# Altium PCB altium_tutorial.PcbDoc
Units mil, origin at the board's own origin, x right, y up, seen from the top; angles counter-clockwise.
Board outline 5695 x 3405 mil, 2 copper layers (Top Layer, Bottom Layer); 56 components, 43 nets, 233 pads, 119 vias.
Unrouted connection lines stored in the file: 167.
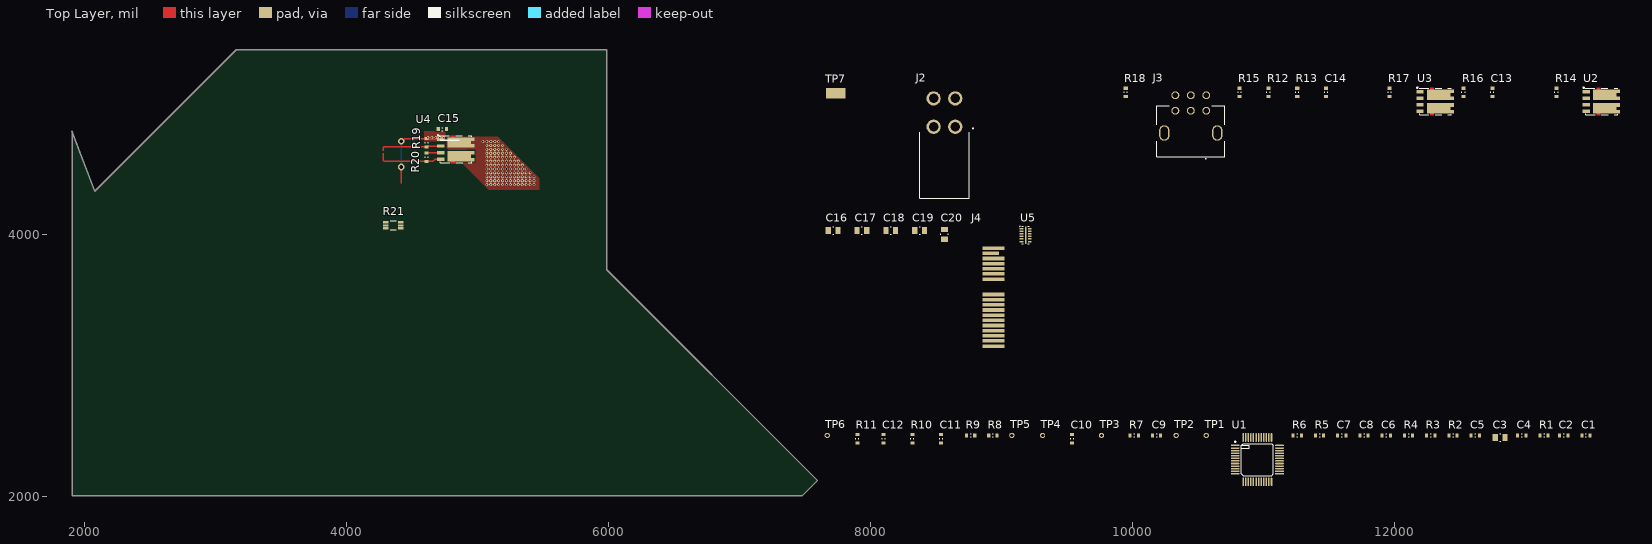
[diagram p0: Top Layer view]
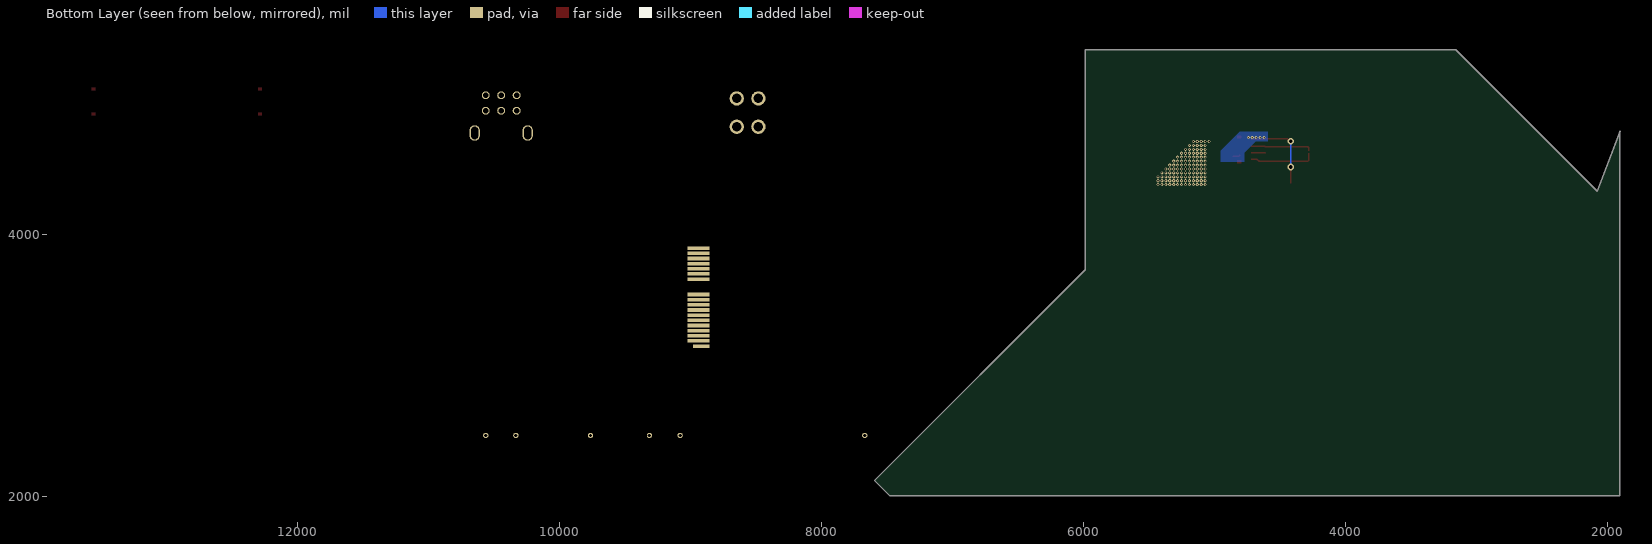
[diagram p1: Bottom Layer view, seen from below]

## Layer stack, top to bottom
Top Solder: solder mask 0.4, Solder Resist, Dk 3.5
Top Layer: signal copper 1.4
Dielectric 1: dielectric 12.6, FR-4, Dk 4.8
Bottom Layer: signal copper 1.4
Bottom Solder: solder mask 0.4, Solder Resist, Dk 3.5

## Board outline
1900,4790 1905,4785 1905,2005 7480,2005 7595,2120 5985,3730 5985,5410 3155,5410 2075,4330

## Design rules (kind name [scope] priority, off if disabled: settings)
Clearance [All] p1: gap=10 ignorepadtopadclearanceinfootprint=FALSE except(0: Arc-Hole Track-Hole SMDPad-Hole THPad-Hole Via-Hole Fill-Hole Poly-Hole Region-Hole Text-Hole)
PolygonConnect PolygonConnect_1 [All vs IsNamedPolygon('NONET_L01_P-001')] p1: connectstyle=Direct reliefconductorwidth=10 reliefentries=4 polygonreliefangle="90 Angle" airgapwidth=10
PolygonConnect [All] p2: connectstyle=Relief reliefconductorwidth=10 reliefentries=4 polygonreliefangle="90 Angle" airgapwidth=10
RoomDefinition motordriver-v3.1_IO [InComponentClass('motordriver-v3.1_IO')] p1: confinementstyle=ConfineIn formatcopy=TRUE lockcomponents=FALSE outline 7640,2645 9265,2645 9265,4175 7640,4175
RoomDefinition motordriver-v3.1_A3931 [InComponentClass('motordriver-v3.1_A3931')] p2: confinementstyle=ConfineIn formatcopy=TRUE lockcomponents=FALSE outline 7640,2065 13525,2065 13525,2595 7640,2595
RoutingVias [All] p1: holewidth=28 width=50 viastyle="Through Hole" minholewidth=28 minwidth=50 maxholewidth=28 maxwidth=50
SolderMaskExpansion [All] p1: expansion=4 istentingtop=FALSE
Width [All] p1: maxlimit=10 minlimit=10 preferedwidth=10
30 further rules are at their usual default settings.

## Classes and differential pairs
net class motordriver-v3.1_power-stage_Nets: 5V AGND CSN_R CSP_R GHA GHB GHC GLA GLB GLC GND_R H1 H2 H3 NetJ2_4 NetJ3_6 NetU2_S1D2 NetU3_S1D2 NetU4_S1D2 SA SB SC VCC
net class motordriver-v3.1_IO_Nets: AGND CSOUT CSOUT_OB DIR DIR_OB FF1 FF1_OB FF2 FF2_OB NetU5_2 NetU5_11 PWM PWM_OB VCC
net class motordriver-v3.1_A3931_Nets: 5V AGND CA CB CC CSN CSN_R CSOUT CSP CSP_R DIR DIRO FF1 FF2 GHA GHB GHC GLA GLB GLC GND_R H1 H2 H3 NetC2_1 NetC2_2 NetC4_1 NetC12_2 NetR9_1 PWM RESET SA SB SC TACHO VCC VDSTH VREF
component class motordriver-v3.1_power-stage: C13 C14 C15 J2 J3 R12 R13 R14 R15 R16 R17 R18 R19 R20 R21 TP7
component class motordriver-v3.1_IO: C16 C17 C18 C19 C20 J4 U5
component class motordriver-v3.1_A3931: C1 C2 C3 C4 C5 C6 C7 C8 C9 C10 C11 C12 R1 R2 R3 R4 R5 R6 R7 R8 R9 R10 R11 TP1 TP2 TP3 TP4 TP5 TP6 U1

## Components (designator, comment, footprint, x,y, rotation, side; value= is the part's Value field where it differs from the comment)
C1 "100nF 50V" 0603 13465,2465 r0 top value=100nF
C2 "470nF 50V" 0603 13295,2465 r0 top value=470nF
C3 "10uF 50V" 0805 12810,2450 r0 top value=10uF
C4 "4.7uF" 0603 12975,2465 r0 top
C5 "82nF 50V" 0603 12620,2465 r0 top value=82nF
C6 "82nF 50V" 0603 11940,2465 r0 top value=82nF
C7 "1000pF" 0603 11600,2465 r0 top
C8 "1000pF" 0603 11770,2465 r0 top
C9 "82nF 50V" 0603 10185,2465 r0 top value=82nF
C10 "1000pF" 0603 9540,2440 r90 top
C11 "100nF 50V" 0603 8540,2440 r90 top value=100nF
C12 "1000pF" 0603 8100,2440 r90 top
C13 "100nF 50V" 0603 12750,5085 r90 top value=100nF
C14 "100nF 50V" 0603 11480,5085 r90 top value=100nF
C15 "100nF 50V" 0603 4730,4805 r0 top value=100nF
C16 "10uF 50V" 0805 7715,4030 r0 top value=10uF
C17 "10uF 50V" 0805 7935,4030 r0 top value=10uF
C18 "10uF 50V" 0805 8155,4030 r0 top value=10uF
C19 "10uF 50V" 0805 8375,4030 r0 top value=10uF
C20 "10uF 50V" 0805 8565,4000 r90 top value=10uF
J2 "CN HDR 4POS Molex 26013115 (R)" 26013115 8565,4535 r0 top
J3 "CN HDR 6POS Molex 43045-0622 (R)" 430450622 10565,4945 r0 top
J4 "CN PCIE 36 Card Edge" "CN PCIE EDGE 36CKT" 8940,3600 r90 top
R1 "200k" 0603 13145,2465 r0 top
R2 "10k" 0603 12450,2465 r0 top
R3 "100k" 0603 12280,2465 r0 top
R4 "10k" 0603 12110,2465 r0 top
R5 "JUMPER" 0603 11430,2465 r0 top value=0
R6 "4.7k" 0603 11260,2465 r0 top
R7 "1k" 0603 10015,2465 r0 top
R8 "1k" 0603 8935,2465 r0 top
R9 "JUMPER" 0603 8765,2465 r0 top value=0
R10 "5.1k" 0603 8320,2440 r90 top
R11 "47k" 0603 7900,2440 r90 top
R12 "10k" 0603 11040,5085 r90 top
R13 "10k" 0603 11260,5085 r90 top
R14 "495k" 0603 13240,5085 r90 top
R15 "10k" 0603 10820,5085 r90 top
R16 "495k" 0603 12530,5085 r90 top
R17 "495k" 0603 11965,5085 r90 top
R18 "495k" 0603 9950,5085 r90 top
R19 "495k" 0603 4610,4700.06 r270 top
R20 "495k" 0603 4610,4590 r270 top
R21 "RES 20m 1W" "1206 - Sense" 4355,4070 r0 top
TP1 "Test Point (Via)" TP 10565,2465 r90 top
TP2 "Test Point (Via)" TP 10335,2465 r90 top
TP3 "Test Point (Via)" TP 9765,2465 r90 top
TP4 "Test Point (Via)" TP 9315,2465 r90 top
TP5 "Test Point (Via)" TP 9080,2465 r90 top
TP6 "Test Point (Via)" TP 7670,2465 r90 top
TP7 "Test Point - 5019" TP380X203 7735,5080 r0 top
U1 "A3931" "48-LQFP-EP (7x7)" 10955,2280 r0 top
U2 "NOTE: Nearing End of Life" PG-TDSON-8-10 13585,5015 r0 top
U3 "NOTE: Nearing End of Life" PG-TDSON-8-10 12315,5015 r0 top
U4 "NOTE: Nearing End of Life" PG-TDSON-8-10 4835,4650 r0 top
U5 "TPD6F002DSVR" PSON50P140X80_HS-13N 9185,3995 r0 top

## Footprints (in the part's own frame and the unit in brackets; to place one, negate y for a bottom-side part, rotate by r counter-clockwise, add the part's x,y. Pads: shape width x height; smd on the part's side, far side on the other; paste and mask are expansions set on the pad)
"48-LQFP-EP (7x7)" [mm]
  oval 1.7x0.3 smd: 1(-4.3,2.75) 2(-4.3,2.25) 3(-4.3,1.75) 4(-4.3,1.25) 5(-4.3,0.75) 6(-4.3,0.25) 7(-4.3,-0.25) 8(-4.3,-0.75) 9(-4.3,-1.25) 10(-4.3,-1.75) 11(-4.3,-2.25) 12(-4.3,-2.75) 25(4.3,-2.75) 26(4.3,-2.25) 27(4.3,-1.75) 28(4.3,-1.25) 29(4.3,-0.75) 30(4.3,-0.25) 31(4.3,0.25) 32(4.3,0.75) 33(4.3,1.25) 34(4.3,1.75) 35(4.3,2.25) 36(4.3,2.75)
  oval 0.3x1.7 smd: 13(-2.75,-4.3) 14(-2.25,-4.3) 15(-1.75,-4.3) 16(-1.25,-4.3) 17(-0.75,-4.3) 18(-0.25,-4.3) 19(0.25,-4.3) 20(0.75,-4.3) 21(1.25,-4.3) 22(1.75,-4.3) 23(2.25,-4.3) 24(2.75,-4.3) 37(2.75,4.3) 38(2.25,4.3) 39(1.75,4.3) 40(1.25,4.3) 41(0.75,4.3) 42(0.25,4.3) 43(-0.25,4.3) 44(-0.75,4.3) 45(-1.25,4.3) 46(-1.75,4.3) 47(-2.25,4.3) 48(-2.75,4.3)
  silkscreen extent -4.42,-3.1 3.1,3.57, body extent -3.5,-3.5 3.5,3.5, height 1.6
0603 [mm] "Chip Resistor, 2-Leads, Body 1.60x0.80mm, IPC High Density"
  rect 0.6x0.8 smd: 1(-0.8,0) 2(0.8,0)
  silkscreen extent -0.1,-0.3 0.1,0.3, body extent -0.8,-0.4 0.8,0.4, height 0.6
0805 [mil]
  rect 40x55 smd: 1(-37,0) 2(37,0)
  silkscreen extent -4,-28 4,28, body extent -47,-28 47,28, height 24
"1206 - Sense" [mil] "4-Wire Sense Footprint"
  rect 41.34x20 smd: 1(-57,-24) 1(-57,24) 2(57,-24) 2(57,24)
  rect 41.34x15 smd paste+0: 3(-57,0) 4(57,0)
  silkscreen extent -24,-33 24,33
26013115 [mm]
  round 2.775 hole 1.85: 1(2.1,7.3) 2(-2.1,7.3) 3(2.1,12.8) 4(-2.1,12.8)
  round 1.525 hole 3.05 unplated: MH1(0,0)
  silkscreen extent -4.8,-6.6 5.6,7.05, body extent -4.8,-6.5 5.2,13.44, height 11.5
430450622 [mm]
  round 1.53 hole 1.02: 1(0,0) 2(-3,0) 3(-6,0) 4(0,3) 5(-3,3) 6(-6,3)
  oval 2x3 hole 1.4 slot 2.4 at 90 deg: MH1(2.15,-4.32) MH2(-8.15,-4.32)
  silkscreen extent -9.57,-9.37 3.57,0.99, body extent -9.62,-8.95 3.58,3.29, height 8.83
"CN PCIE EDGE 36CKT" [mm] "PCIE X1 36pin card edge"
  rect 0.7x3.2 smd far side paste-1: A1(-11.5,0.5)
  rect 0.7x4.2 smd far side paste-1: A2(-10.5,0) A3(-9.5,0) A4(-8.5,0) A5(-7.5,0) A6(-6.5,0) A7(-5.5,0) A8(-4.5,0) A9(-3.5,0) A10(-2.5,0) A11(-1.5,0) A12(1.5,0) A13(2.5,0) A14(3.5,0) A15(4.5,0) A16(5.5,0) A17(6.5,0) A18(7.5,0)
  rect 0.7x4.2 smd paste-1: B1(-11.5,0) B2(-10.5,0) B3(-9.5,0) B4(-8.5,0) B5(-7.5,0) B6(-6.5,0) B7(-5.5,0) B8(-4.5,0) B9(-3.5,0) B10(-2.5,0) B11(-1.5,0) B12(1.5,0) B13(2.5,0) B14(3.5,0) B15(4.5,0) B16(5.5,0) B18(7.5,0)
  rect 0.7x3.2 smd paste-1: B17(6.5,0.5)
PG-TDSON-8-10 [mm] "Infineon specific mosfet array footprint"
  rect 1.4x0.65 smd paste-0.1: 1(-2.99,1.905) 2(-2.99,0.635) 3(-2.99,-0.635) 4(-2.99,-1.905)
  rect 4.6x2 smd paste-3: 6(0.625,-1.325) 8(0.625,1.325)
  rect 1.4x0.7 smd paste-0.1: 6(2.89,-1.99) 6(2.89,-0.66) 8(2.89,0.66) 8(2.89,1.99)
  Top Layer region: -1.04,2.1 -0.25,2.1 -0.25,2.7 -1.04,2.7
  Top Layer region: -1.04,-2.7 -0.25,-2.7 -0.25,-2.1 -1.04,-2.1
  silkscreen extent -3.6,-2.6 3.08,2.8, body extent -3.07,-2.57 3.08,2.58, height 1.1
PSON50P140X80_HS-13N [mm] "PSON, 12-Leads, Body 3.00x1.35mm, Pitch 0.50mm, Thermal Pad 3.05x0.31mm, IPC Medium Density"
  rect 0.7x0.3 smd: 1(-0.8,1.25) 2(-0.8,0.75) 3(-0.8,0.25) 4(-0.8,-0.25) 5(-0.8,-0.75) 6(-0.8,-1.25) 7(0.8,-1.25) 8(0.8,-0.75) 9(0.8,-0.25) 10(0.8,0.25) 11(0.8,0.75) 12(0.8,1.25)
  rect 0.31x3.4 smd: 13(0,0)
  silkscreen extent -1.17,-1.7 0.72,1.75, body extent -0.72,-1.55 0.72,1.55, height 0.8
TP [mil] "Test point (40mil Standard)"
  round 40 hole 25: 1(0,0)
TP380X203 [mm]
  rect 3.8x2.03 smd: 1(0,0)

## Part data
C1 C11 C13 C14 C15: library part "CAP 100nF 50V", "CAP CER 0.1UF 50V X7R 0805", Package=0805, Rating=50V, Tolerance=10%
C2: library part "CAP 470nF 50V", "CAP CER 0.1UF 50V X7R 0805", Package=0805, Rating=50V, Tolerance=10%
C3 C16 C17 C18 C19 C20: library part "CAP 10uF 50V", "CAP CER 10UF 50V X7R", Package=1210, Rating=50V, Tolerance=10%, ComponentLink1Description=digikey, ComponentLink1URL=https://www.digikey.ca/en/products/detail/kemet/C1210C106M5RACTU/4918883
C4: library part "CAP 4.7uF 35V", "CAP CER 4.7UF 35V X7R 0603/0805", Operating Temperature="-55°C ~ 125°C", Package=0603/0805, Rating=35V, Temperature Coefficient=X7R, Tolerance=10%
C5 C6 C9: library part "CAP 82nF 50V", "CAP CER 0.082UF 50V X7R 0805", Alt. Value=82nF, Package=0805, Rating=50V, Tolerance=5%
C7 C8 C10 C12: library part "CAP 1000pF 50V", "CAP CER 1000PF 50V X7R 0603/0805", Operating Temperature="-55°C ~ 125°C", Package=0603/0805, Rating=50V, Temperature Coefficient=X7R, Tolerance=10%
J2: "Molex 26013115 4POS Minifit / dual row, right angle"
J3: "Molex 43045-0622 6POS Microfit / dual row, right angle"
J4: "36 Position Male PCIE Connector"
R1: library part "RES 200k 1/8W", "RES SMD 200K OHM 5% 1/8W 0805", Package=0805, Power (Watts)=0.125W, Tolerance=5%
R2 R4 R12 R13 R15: library part "RES 10k 1/8W - 1%", "RES SMD 10K OHM 1% 1/8W 0805", Package=0805, Power (Watts)=0.125W, Tolerance=1%
R3: library part "RES 100k 1/8W - 1%", "RES SMD 100K OHM 1% 1/8W 0805", Package=0805, Power (Watts)=0.125W, Tolerance=1%
R5 R9: library part "RES 0 JUMPER", "RES SMD 0 OHM JUMPER GENERIC 0805", Package=0805
R6: library part "RES 4.7k 1/8W - 1%", "RES SMD 4.7k OHM 1% 1/8W 0805", Package=0805, Power (Watts)=0.125W, Tolerance=1%
R7 R8: library part "RES 1k 1/8W", "RES SMD 1K OHM 5% 1/8W 0805", Package=0805, Power (Watts)=0.125W, Tolerance=5%
R10: library part "RES 5.1k 1/8W - 1%", "RES SMD 5.1K OHM 1% 1/8W 0805", Package=0805, Power (Watts)=0.125W, Tolerance=1%
R11: library part "RES 47k 1/8W - 1%", "RES SMD 47K OHM 1% 1/8W 0805", Package=0805, Power (Watts)=0.125W, Tolerance=1%
R14 R16 R17 R18 R19 R20: library part "RES 495k 1/8W", "RES SMD 499K OHM 1% 1/8W 0805", Case Code (Imperial)=0805, Case Code (Metric)=2012, Manufacturer=Yageo, Manufacturer Part Number=RC0805FR-07499KL, Max Operating Temperature=155°C, Min Operating Temperature=-55°C, Power Rating=125mW, Resistance=499kR, Supplier Part Number 1=311-499KCRCT-ND, Temperature Coefficient=100ppm/°C, Tolerance=1%, Voltage Rating=150V, Case/Package=0805, Category="Chip SMD Resistors", ComponentLink1Description=https://datasheet.ciiva.com/15189/getdatasheetpartid-326570-15189975.pdf?src-supplier=Verical, ComponentLink1URL=https://datasheet.ciiva.com/15189/getdatasheetpartid-326570-15189975.pdf?src-supplier=Verical, Composition="Thick Film", Contact Plating=Tin,Lead,Matte, Depth=1.25mm, Lead Free="Lead Free", Length=2mm, Military Standard=Not, Packaging="Tape and Reel", Pricing 1="1=0.10000, 10=0.04000, 100=0.01630, 1000=0.00731, 2500=0.00635 (USD)", Radiation Hardening=No, RoHS=Yes, Stock 1=2275, Supplier 1=Digi-Key, Termination=SMD/SMT, Voltage Rating (DC)=150V
R21: "RES SMD 0.02 OHM 1% 1W 1206"
TP7: "PC Test Point, Miniature Phosphor Bronze, Silver Plating Surface Mount Mounting Type", Package="2010 Keystone", Digi-Key_Part_Number=36-5019CT-ND, Digi-Key_Purchase_URL=https://www.digikey.com/product-detail/en/keystone-electronics/5019/36-5019CT-ND/3907344?utm_source=snapeda&utm_medium=aggregator&utm_campaign=symbol, MF="Keystone Electronics", MP=5019
U1: library part A3931_A1, "IC MOTOR DRIVER 5.5V-50V 48LQFP - Alternative Symbol", Supplier Part Number 1=620-1290-1-ND, Digikey=620-1290-1-ND, Digikey Link=https://www.digikey.ca/product-detail/en/allegro-microsystems/A3931KJPTR-T/620-1290-1-ND/2000021, Supplier 1=Digi-Key
U2 U3 U4: library part "MOSFET IPG20N06S4-15A", "MOSFET N+N 60V 20A", Supplier Part Number 1=726-IPG20N06S415ATMA, MF="Infineon Technologies", MF P/N=IPG20N06S4-15A, Supplier 1=Mouser
U5: library part "EMI FILTER TPD6F002DSVR", "6-Channel EMI Filter for Display Interface", Manufacturer="Texas Instruments", PACKAGE_DESIGNATOR=DSV, Copyright="Copyright (C) 2018 Accelerated Designs. All rights reserved", Datasheet_URL=http://www.ti.com/lit/gpn/TPD6F002, FAMILY_NAME="EMI Solution", GENERIC_PART_NUMBER=TPD6F002, INDUSTRY_STD_PKG_TYPE=SON, Manufacturer_Part_Number=TPD6F002DSVR, PIN_COUNT=12, RefDes=RefDes, Type=DEV, Vendor="Texas Instruments"

## Via types
v1: diameter 23.62, hole 11.81, Top Layer to Bottom Layer, 117 vias
v2: diameter 50, hole 28, Top Layer to Bottom Layer, 2 vias

## Nets (pads, with @x,y where several pads share a name; then routed paths per layer and width w, separated by ;. In a path a pad name is that pad's centre, name@x,y a point inside that pad or via, vN(x,y) a via of type N, cw(c..) or ccw(c..) an arc to the next point about the centre after c; other vN are vias at no path point)
5V: C3.2 J3.5 R2.1 R3.1 R9.2 R12.1 R13.1 R15.1 U1.3 U1.4 U1.8 U1.39 U1.46
AGND: C1.1 C3.1 C4.2 C7.1 C8.1 C11.1 C12.1 C16.2 C17.2 C18.2 C19.2 C20.2 J3.4 J4.A12 J4.A14 J4.B1 J4.B2 J4.B3 J4.B4 J4.B5 J4.B6 J4.B7 J4.B8 J4.B9 J4.B10 J4.B11 J4.B12 J4.B14 R4.1 R5.1 R6.2 R10.2 R11.2 R21.2 TP6.1 TP7.1 U1.1 U1.13 U1.15 U1.17 U1.37 U1.41 U1.47 U1.48 U5.13
CA: C5.1 U1.33
CB: C6.1 U1.30
CC: C9.1 U1.27
CSN: C10.1 R8.2 U1.21
CSN_R: R8.1 R21.4
CSOUT: U1.19 U5.1
CSOUT_OB: J4.A13 J4.B13 U5.12
CSP: C10.2 R7.2 U1.22
CSP_R: R7.1 R21.3
DIR: U1.9 U5.4
DIR_OB: J4.A16 J4.B16 U5.9
DIRO: U1.44
FF1: TP2.1 U1.6 U5.5
FF1_OB: J4.A17 J4.B17 U5.8
FF2: TP1.1 U1.5 U5.6
FF2_OB: J4.A18 J4.B18 U5.7
GHA: R14.2 U1.32 U2.2
GHB: R17.2 U1.29 U3.2
GHC: R19.2 U1.26 U4.2 | length 465.1
  Top Layer w10: 4280,4640 4280,4662.71 4285.86,4668.57 R19.2 4613.22,4671.78 4714.07,4671.78 U4.2
GLA: R16.2 U1.36 U2.4
GLB: R18.2 U1.35 U3.4
GLC: R20.2 U1.34 U4.4 | length 502
  Top Layer w10: 4280,4619.83 4280,4564.36 4285.86,4558.5 R20.2 4658.5,4558.5 4675,4575 U4.4
GND_R: C11.2 C13.1 C14.1 C15.1 R16.1 R18.1 R20.1 R21.1 U1.38 U2.3 U3.3 U4.3 | length 108.7
  Top Layer w10: R20.1 4611.75,4623.25 4715.53,4623.25 U4.3
H1: J3.3 R15.2 TP3.1 U1.10
H2: J3.1 R13.2 TP4.1 U1.11
H3: J3.2 R12.2 TP5.1 U1.12
NetC2_1: C2.1 U1.43
NetC2_2: C2.2 U1.42
NetC4_1: C4.1 U1.40
NetC12_2: C12.2 R11.1 U1.16
NetR9_1: R9.1 R10.1 U1.18
PWM: R4.2 U1.14 U5.3
PWM_OB: J4.A15 J4.B15 U5.10
RESET: R1.1 U1.2
SA: C5.2 J2.3 R14.1 U1.31 U2.1 U2.6
SB: C6.2 J2.1 R17.1 U1.28 U3.1 U3.6
SC: C9.2 J2.2 R19.1 U1.25 U4.1 U4.6 | length 708.1
  Top Layer w10: 4415,4391.55 v2(4415,4515) ; v2(4415.68,4711.73) 4415,4711.05 4415,4705 4441.56,4731.56 R19.1 4613.28,4728.28 4714,4728.28 U4.1 ; U4.6@4800,4610 4812.17,4597.83 U4.6@4859.61,4597.83
  Bottom Layer w10: v2(4415,4515) 4415.34,4515.34 4415.34,4711.39 v2(4415.68,4711.73)
  other v1: 4620,4740 4650,4740 4680,4740 4710,4740 4740,4740
TACHO: U1.7
VCC: C1.2 C13.2 C14.2 C15.2 C16.1 C17.1 C18.1 C19.1 C20.1 J4.A1 J4.A2 J4.A3 J4.A4 J4.A5 J4.A6 J4.A7 J4.A8 J4.A9 J4.A10 J4.A11 R1.2 U1.24 U1.45 U2.8 U3.8 U4.8
  other v1: 5070,4380 5100,4380 5130,4380 5160,4380 5190,4380 5220,4380 5250,4380 5280,4380 5310,4380 5340,4380 5370,4380 5400,4380 5430,4380 5070,4410 5100,4410 5130,4410 5160,4410 5190,4410 5220,4410 5250,4410 5280,4410 5310,4410 5340,4410 5370,4410 5400,4410 5430,4410 5070,4440 5100,4440 5130,4440 5160,4440 5190,4440 5220,4440 5250,4440 5280,4440 5310,4440 5340,4440 5370,4440 5400,4440 5430,4440 5070,4470 5100,4470 5130,4470 5160,4470 5190,4470 5220,4470 5250,4470 5280,4470 5310,4470 5340,4470 5370,4470 5400,4470 5070,4500 5100,4500 5130,4500 5160,4500 5190,4500 5220,4500 5250,4500 5280,4500 5310,4500 5340,4500 5370,4500 5070,4530 5100,4530 5130,4530 5160,4530 5190,4530 5220,4530 5250,4530 5280,4530 5310,4530 5340,4530 5070,4560 5100,4560 5130,4560 5160,4560 5190,4560 5220,4560 5250,4560 5280,4560 5310,4560 5070,4590 5100,4590 5130,4590 5160,4590 5190,4590 5220,4590 5250,4590 5280,4590 5070,4620 5100,4620 5130,4620 5160,4620 5190,4620 5220,4620 5250,4620 5070,4650 5100,4650 5130,4650 5160,4650 5190,4650 5220,4650 5070,4680 5100,4680 5130,4680 5160,4680 5190,4680 5040,4710 5070,4710 5100,4710 5130,4710 5160,4710
VDSTH: C7.2 R3.2 R6.1 U1.23
VREF: C8.2 R2.2 R5.2 U1.20
pads on no net: J2.4 J2.MH1 J3.6 J3.MH1 J3.MH2 U5.2 U5.11

## Polygon pours and split planes (outlines as drawn)
VCC on Top Layer "NONET_L01_P-001" (solid, pour order 0): 4775,4745 5155,4745 5470,4430 5470,4340 5085,4340 4765,4660 4765,4735
SC on Top Layer "NONET_L01_P-001" (solid, pour order 3): 4592.26,4711.43 4747.26,4711.43 4752.26,4716.43 4752.26,4786.43 4592.26,4786.43
SC on Bottom Layer "NONET_L01_P-001" (solid, pour order 2): 4950,4640 4950,4555 4770,4555 4770,4625 4685,4710 4590,4710 4590,4785 4805,4785

## Silkscreen, mask and mechanical layers (free items; w line width, h text height)
Top Overlay:
  lines w10: 4715,4720 4860,4720